# Altium PCB 2.0_X0.PcbDoc (part 2 of 2)
Units mm, origin at the board's own origin, x right, y up, seen from the top; angles counter-clockwise.
Board outline 35 x 45.39 mm, 4 copper layers (Top, Route2, Route15, Bottom), stack 1.64 mm thick; 99 components, 106 nets, 391 pads, 199 vias.
Unrouted connection lines stored in the file: 53.
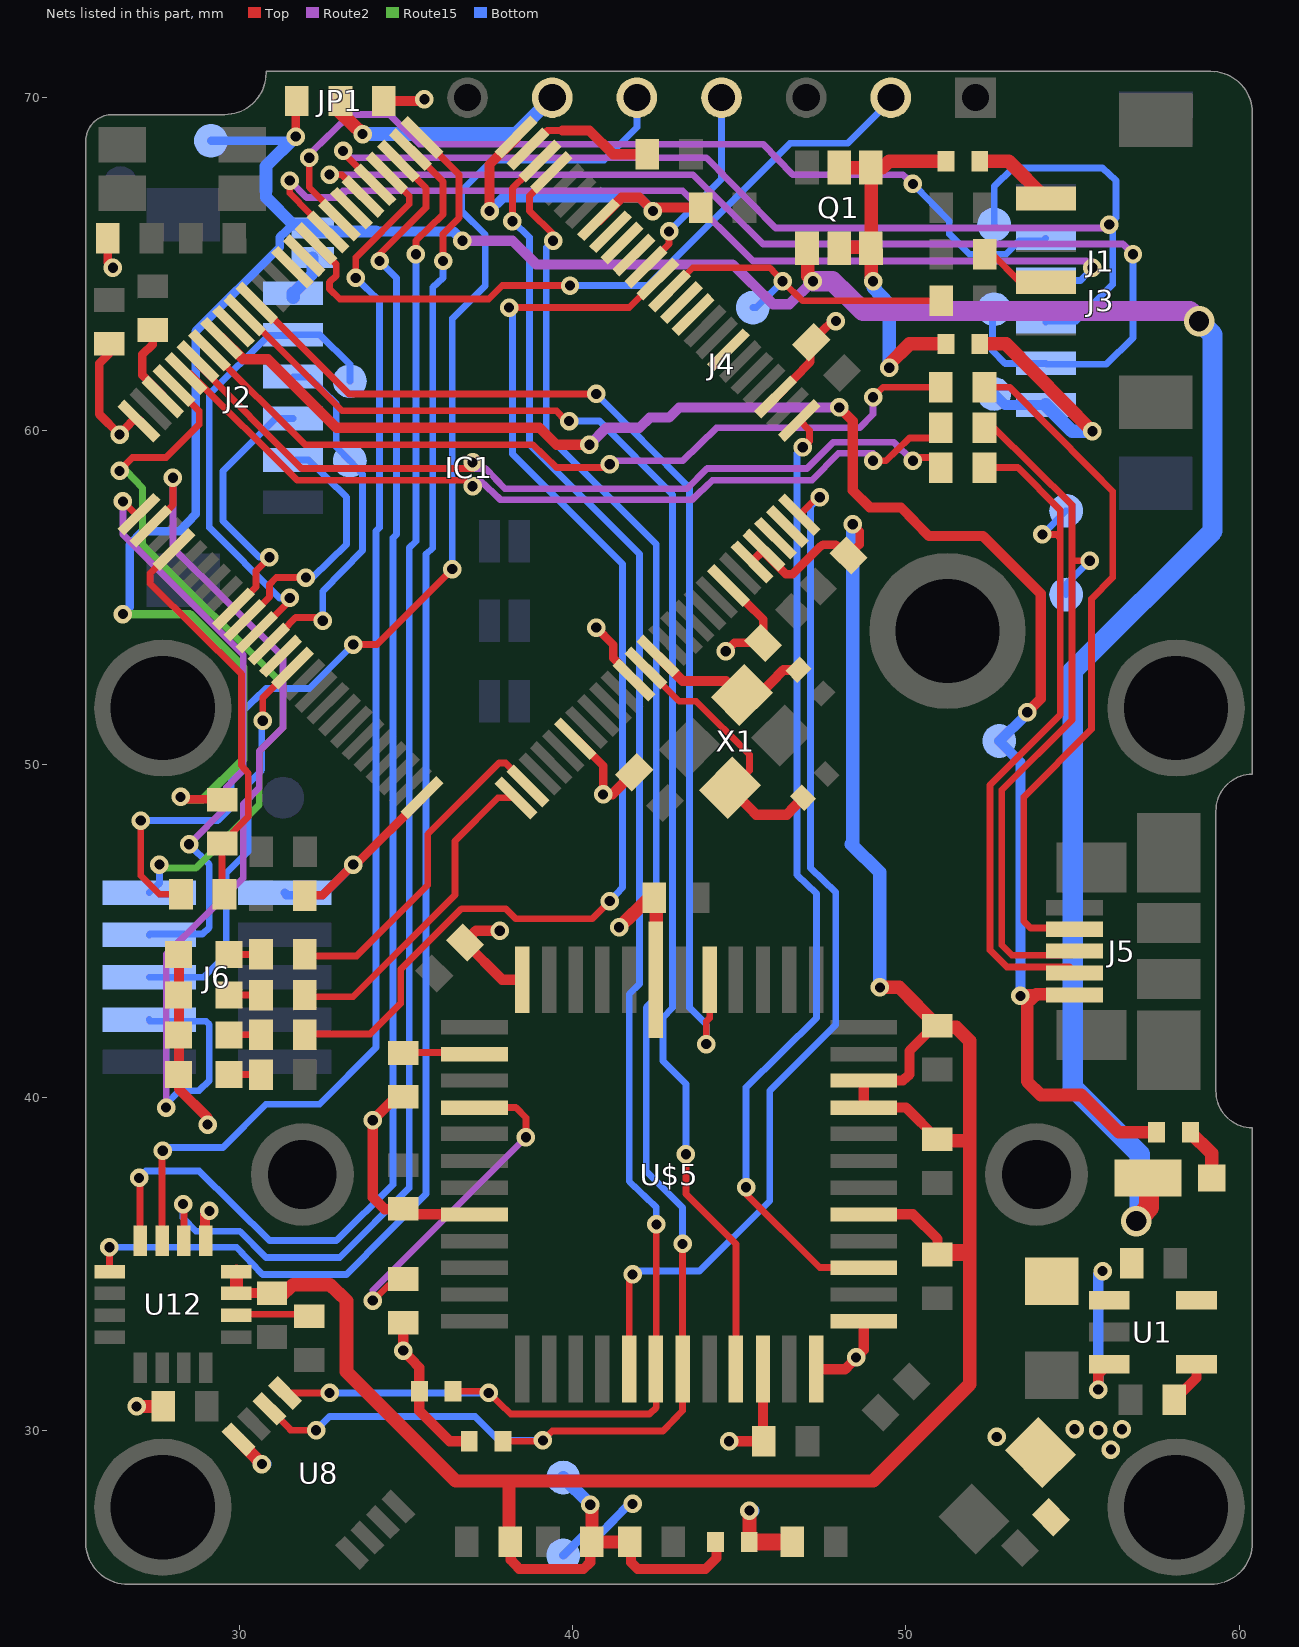
[diagram p4: the nets of this part, all layers, seen from the top]

## Via types
v1: diameter 0.555/0.555/0.555/0.555 (per signal layer), hole 0.305, Top to Bottom, 197 vias
v2: diameter 0.914/0.86/0.86/0.914 (per signal layer), hole 0.61, Top to Bottom, 2 vias

## Nets (pads, with @x,y where several pads share a name; then routed paths per layer and width w, separated by ;. In a path a pad name is that pad's centre, name@x,y a point inside that pad or via, vN(x,y) a via of type N, cw(c..) or ccw(c..) an arc to the next point about the centre after c; other vN are vias at no path point) (continued)
I2C1_SDA_EXT: J1.3 R4.2 | length 2.2
  Top w0.203: R4.2@52.375,65.303 52.603,65.303 53.416,64.491 54.178,64.491 J1.3@54.204,64.465
I2C2_SCL: IC1.47 R1.P$1 U8.6 U$5.25 | length 54.6
  Top w0.203: U8.6@30.912,30.658 31.547,30.048 31.547,30.023 v1(32.309,30.023) ; R1.P$1@37.922,29.693 39.091,29.693 v1(39.116,29.718) ; v1@39.04,29.642 v1(39.116,29.718) ; IC1.47@39.395,67.742 38.71,67.056 38.71,66.599 39.421,65.913 v1(39.421,65.71) ; v1(43.307,35.611) 43.307,31.852 43.307,30.607 42.723,29.997 39.395,29.997 v1(39.116,29.718)
  Bottom w0.203: v1(32.309,30.023) 32.715,30.429 37.084,30.429 37.795,29.718 v1(39.116,29.718) ; v1(39.421,65.71) 39.218,65.507 39.218,59.893 42.52,56.591 42.52,43.002 42.215,42.697 42.215,37.795 43.307,36.703 v1(43.307,35.611)
I2C2_SDA: IC1.48 R2.P$1 U8.5 U$5.24 | length 52.4
  Top w0.203: U8.5@31.369,31.115 31.42,31.14 v1(32.715,31.14) ; R2.P$1@36.424,31.191 37.465,31.191 v1(37.49,31.14) 38.151,30.505 42.316,30.505 42.52,30.709 42.52,31.852 v1(42.52,36.195) ; v1(38.202,66.294) 38.202,67.285 IC1.48@39.04,68.097
  Bottom w0.203: v1(32.715,31.14) v1(37.49,31.14) ; v1(38.202,66.294) 38.71,65.811 38.71,59.588 42.012,56.312 42.012,43.409 41.707,43.104 41.707,37.49 42.52,36.703 v1(42.52,36.195)
I2C3_SCL---: IC1.67
JTCK-SWCLK: IC1.76 J6.4 | length 17.8
  Top w0.203: v1(26.518,57.887) 26.924,57.48 IC1.76@27.026,57.48
  Route2 w0.203: v1@26.518,57.683 v1@26.518,57.709 ; v1(26.518,57.887) v1@26.518,57.709 ; v1(28.499,47.6) 29.616,48.717 29.616,49.301 30.124,49.809 30.124,53.289 26.518,56.896 v1@26.518,57.709
  Bottom w0.203: J6.4@27.305,44.882 27.33,44.907 28.905,44.907 29.108,45.11 29.108,46.99 v1(28.499,47.6)
JTDI: IC1.77 J6.8 | length 28.7
  Top w0.203: IC1.77@27.356,57.125 28.016,57.785 v1(28.016,58.598)
  Route2 w0.203: v1(27.813,39.7) 27.813,44.298 30.124,46.584 30.124,48.793 30.607,49.301 30.607,50.394 31.318,51.105 31.318,53.213 28.016,56.49 28.016,56.871 v1(28.016,58.598)
  Bottom w0.203: J6.8@27.305,42.342 27.33,42.291 29.007,42.291 29.108,42.189 29.108,40.513 28.804,40.208 28.219,40.208 27.813,39.802 v1(27.813,39.7)
JTDO: IC1.89 J6.6 | length 12
  Top w0.203: v1(30.709,51.308) 30.709,51.994 IC1.89@31.598,52.883
  Bottom w0.203: J6.6@27.305,43.612 28.931,43.612 29.616,44.298 29.616,46.736 30.277,47.396 30.277,49.428 30.683,49.835 30.683,51.283 v1(30.709,51.308)
JTMS-SWDIO: IC1.72 J6.2 | length 21.7
  Top w0.203: v1(26.416,58.801) 26.797,59.207 27.813,59.207 28.804,60.198 28.804,60.604 28.067,61.341 IC1.72@28.067,61.366
  Route15 w0.203: v1(26.416,58.801) 26.619,58.801 27.102,58.293 27.102,56.591 31.318,52.4 31.318,51.105 30.607,50.394 30.607,48.793 28.702,46.888 27.711,46.888 v1(27.61,46.99)
  Bottom w0.203: J6.2@27.305,46.152 27.61,46.431 v1(27.61,46.99)
LED_AMBER: IC1.1 R14.1 | length 9.8
  Top w0.203: R14.1@31.979,43.078 32.029,43.028 33.426,43.028 36.474,46.076 36.474,47.701 37.77,48.997 IC1.1@38.329,48.997
LED_BLUE: IC1.2 R15.1 | length 10.3
  Top w0.203: R15.1@31.979,44.298 32.004,44.247 33.528,44.247 35.662,46.38 35.662,47.904 37.795,50.038 37.998,50.038 38.684,49.378 IC1.2@38.684,49.352
LED_RED: IC1.38 R17.1 | length 36.1
  Top w0.203: R17.1@31.979,41.885 32.004,41.91 33.934,41.91 34.849,42.824 34.849,43.84 36.678,45.669 37.998,45.669 38.303,45.364 40.589,45.364 v1(41.123,45.898) 40.919,45.695 ; v1(38.1,63.703) 41.707,63.703 IC1.38@42.57,64.567
  Bottom w0.203: v1(38.1,63.703) 38.202,63.602 38.202,59.309 41.504,56.007 41.504,46.304 v1(41.123,45.898)
MAG_DRDY---: IC1.36
N$1: C4.P$2 IC1.13 X1.1 | length 5
  Top w0.305: IC1.13@42.57,53.238 43.307,52.502 44.602,52.502 45.034,52.07 45.085,52.07 45.11,52.095 45.618,52.095 46.33,52.832 C4.P$2@46.787,52.832
N$2: C3.P$1 IC1.12 X1.3 | length 8.2
  Top w0.203: IC1.12@42.215,52.883 43.205,51.892 43.713,51.892 45.314,50.292 45.314,49.809 44.831,49.327 X1.3@44.729,49.327
  Top w0.305: X1.3@44.729,49.327 44.729,49.276 45.314,48.692 45.517,48.489 46.431,48.489 C3.P$1@46.914,48.997
N$3: J1.1 L2.P$2 | length 2.4
  Top w0.406: L2.P$2@52.222,68.097 53.086,68.097 J1.1@54.204,66.98
N$4: C13.1 U1.4 | length 1.4
  Top w0.305: C13.1@58.064,30.937 58.725,31.598 U1.4@58.725,32.029
N$8: LED4.C R17.2 | length 1
  Top w0.203: LED4.C@29.693,41.885 R17.2@30.683,41.885
N$10: R19.1 U$5.8 | length 2.2
  Top w0.203: R19.1@34.925,41.351 37.033,41.351 U$5.8@37.084,41.3
N$11: R20.1 U$5.10 | length 10.2
  Top w0.203: v1(34.011,33.909) 34.671,34.544 R20.1@34.925,34.544 ; U$5.10@37.084,39.7 38.303,39.7 38.608,39.395 v1(38.608,38.811)
  Route2 w0.203: v1(34.011,33.909) 34.011,34.214 v1(38.608,38.811)
N$13: J2.1 JP2.2 | length 1.4
  Bottom w0.356: J2.1@31.623,64.135 32.207,64.719 JP2.2@32.207,65.202
  Bottom w0.406: J2.1@31.623,64.008 J2.1@31.623,64.135
N$23: D1.ANODE L8.P$1 | length 1.7
  Top w0.406: L8.P$1@58.522,38.964 59.182,38.329 D1.ANODE@59.182,37.592
N$28: LED3.C R15.2 | length 1
  Top w0.203: LED3.C@29.693,44.298 R15.2@30.683,44.298
N$29: LED1.C R13.2 | length 1
  Top w0.203: LED1.C@29.693,40.691 R13.2@30.683,40.691
N$30: LED2.C R14.2 | length 1
  Top w0.203: LED2.C@29.693,43.078 R14.2@30.683,43.078
N$34: C25.1 U12.14 | length 2.2
  Top w0.203: U12.14@29.921,33.503 32.055,33.503 C25.1@32.106,33.452
OTG_FS_ID: IC1.69 R7.2 | length 24.7
  Top w0.203: IC1.69@29.134,62.433 31.979,59.588 32.715,59.588 38.811,59.588 39.522,58.903 41.021,58.903 v1(41.123,59.004) ; v1(49.022,61.011) 49.327,61.316 R7.2@51.054,61.315
  Route2 w0.203: v1(41.123,59.004) 41.224,59.106 43.307,59.106 44.323,60.096 48.616,60.096 49.022,60.503 v1(49.022,61.011)
OTG_FS_N: IC1.70 R6.2 | length 25.3
  Top w0.203: IC1.70@28.778,62.078 28.778,61.976 31.877,58.877 37.008,58.877 v1(37.008,59.055) ; v1(50.216,59.106) 50.317,59.207 50.775,59.207 R6.2@51.054,58.902
  Route2 w0.203: v1(37.008,59.055) 37.008,58.877 37.389,58.877 37.973,58.268 43.434,58.268 44.044,58.877 47.041,58.877 47.828,59.665 49.632,59.665 v1(50.216,59.106)
OTG_FS_P: IC1.71 R8.2 | length 25.8
  Top w0.203: IC1.71@28.423,61.722 28.524,61.722 31.75,58.522 37.008,58.522 v1(37.008,58.344) ; v1(49.022,59.106) 49.403,59.106 50.114,59.792 50.749,59.792 R8.2@51.054,60.096
  Route2 w0.203: v1(37.008,58.344) 37.008,58.522 37.236,58.522 37.846,57.937 43.586,57.937 44.196,58.522 47.193,58.522 47.981,59.334 49.022,59.334 v1(49.022,59.106)
OTG_ID: J5.ID R7.1 | length 20.8
  Top w0.203: R7.1@52.375,61.316 53.111,61.316 55.575,58.826 56.21,58.191 56.21,55.601 55.575,54.966 55.575,51.054 53.543,49.022 53.543,45.288 53.746,45.085 54.762,45.085 55.067,45.085 J5.ID@55.093,45.06
OTG_N: J5.D- OTG_DM.P$1 R6.1 | length 21.3
  Top w0.203: R6.1@52.375,58.903 53.365,58.903 54.635,57.633 54.635,56.794 ; v1(54.102,56.896) 54.534,56.896 54.635,56.794 ; J5.D-@55.093,43.764 54.915,43.917 53.035,43.917 52.527,44.425 52.527,49.378 54.635,51.486 54.635,56.794
  Bottom w0.203: v1(54.102,56.896) OTG_DM.P$1@54.813,57.607
OTG_P: J5.D+ OTG_DP.P$1 R8.1 | length 21.9
  Top w0.203: R8.1@52.375,60.096 52.654,60.096 54.991,57.785 54.991,56.109 ; J5.D+@55.093,44.399 54.966,44.272 53.188,44.272 52.883,44.577 52.883,49.225 54.991,51.333 54.991,56.109 ; v1(55.524,56.109) 54.991,56.109
  Bottom w0.203: OTG_DP.P$1@54.813,55.093 54.813,55.397 v1(55.524,56.109)
PB2-BOOT1: BOOT1.P$1 IC1.37 R5.1 | length 10
  Top w0.203: IC1.37@42.926,64.211 43.612,64.897 45.923,64.897 v1(46.304,64.491) 46.914,63.906 R5.1@51.054,63.906
  Bottom w0.203: BOOT1.P$1@45.415,63.703 45.517,63.703 v1(46.304,64.491)
PRES_DRDY---: IC1.35
SONAR_TX: J4.TX R11.1 | length 36
  Top w0.203: v1(27.051,48.311) 27.051,46.66 27.61,46.101 R11.1@28.27,46.101 ; v1(33.426,53.594) 34.138,53.594 v1(36.398,55.855)
  Bottom w0.203: v1(27.051,48.311) 29.362,48.311 29.769,48.717 29.769,49.632 30.074,49.936 30.074,51.562 30.81,52.273 32.106,52.273 v1(33.426,53.594) ; v1(36.398,55.855) 36.398,63.373 37.389,64.364 37.389,65.888 36.678,66.599 36.678,67.208 37.592,68.123 40.945,68.123 41.935,69.113 J4.TX@41.935,70.002
SPI1_MOSI---: IC1.32
SPI2_MISO: IC1.53 U12.4 | length 43
  Top w0.203: v1(27,37.592) 27.026,37.567 U12.4@27.026,35.712 ; v1(34.214,65.1) 34.214,65.303 35.611,66.7 35.611,67.285 IC1.53@34.798,68.097
  Bottom w0.203: v1(27,37.592) 27.203,37.795 28.804,37.795 30.912,35.712 32.918,35.712 34.62,37.389 34.62,56.794 34.722,56.896 34.722,64.592 v1(34.214,65.1)
SPI2_MOSI: IC1.54 U12.3 | length 37.9
  Top w0.203: U12.3@27.686,35.712 27.686,38.379 v1(27.711,38.405) ; v1(33.503,64.592) 33.503,65.202 35.103,66.802 35.103,67.056 IC1.54@34.442,67.742
  Bottom w0.203: v1(27.711,38.405) 27.813,38.506 29.515,38.506 30.81,39.802 32.41,39.802 34.112,41.504 34.112,56.998 34.214,57.099 34.214,63.906 v1(33.503,64.592)
SPI2_NSS: IC1.51 U12.5 | length 44.2
  Top w0.203: v1(26.111,35.509) 26.111,34.798 U12.5@26.137,34.798 ; IC1.51@35.509,68.809 36.601,67.691 36.601,66.396 36.119,65.913 v1(36.119,65.1)
  Bottom w0.203: v1(26.111,35.509) 29.921,35.509 30.709,34.696 33.223,34.696 35.611,37.109 35.611,37.186 35.611,56.312 35.814,56.49 35.814,64.313 36.119,64.592 v1(36.119,65.1)
SPI2_SCK: IC1.52 U12.2 | length 41.7
  Top w0.203: v1(28.321,36.805) 28.346,36.779 28.346,35.712 U12.2@28.346,35.687 ; IC1.52@35.154,68.453 36.119,67.488 36.119,66.497 35.306,65.71 v1(35.306,65.303)
  Bottom w0.203: v1(28.321,36.805) 28.321,36.398 28.702,35.992 30.023,35.992 30.81,35.204 33.02,35.204 35.103,37.287 35.103,56.49 35.306,56.693 v1(35.306,65.303)
TIM1_CH1: IC1.40
TIM1_CH2: IC1.42
TIM4_CH2: IC1.60 J4.PW | length 21.2
  Top w0.203: IC1.60@32.309,65.608 32.918,64.999 32.918,64.668 32.715,64.465 32.715,64.262 33.02,63.957 37.49,63.957 37.897,64.364 v1(39.929,64.364)
  Bottom w0.203: v1(39.929,64.364) 42.266,64.364 46.533,68.631 48.26,68.631 49.555,69.926 J4.PW@49.555,70.002
TIM4_CH3: IC1.61
TIM4_CH4: IC1.62
TIM5_CH1: IC1.23
TIM5_CH2: IC1.24
TIM5_CH3_EXPOSURE: IC1.25 U$5.23 | length 31.2
  Top w0.203: U$5.23@41.707,31.852 41.707,34.595 v1(41.808,34.696) ; IC1.25@46.812,57.48 47.422,58.09 v1(47.422,58.014)
  Bottom w0.203: v1(41.808,34.696) 41.91,34.798 43.815,34.798 45.923,36.906 45.923,40.208 47.904,42.189 47.904,46.152 47.142,46.888 47.142,57.734 v1(47.422,58.014)
TIM5_CH4_STANDBY: IC1.26 U$5.33 | length 29.1
  Top w0.203: v1(45.212,37.313) 45.212,37.109 47.422,34.9 U$5.33@48.743,34.9 ; IC1.26@46.812,60.325 47.117,60.02 47.117,59.69 v1(46.914,59.512)
  Bottom w0.203: v1(45.212,37.313) 45.212,40.31 47.32,42.393 47.32,46.126 46.736,46.685 46.736,59.334 v1(46.914,59.512)
TIM8_CH3_MASTERCLOCK: IC1.65 U$5.47 | length 34.1
  Top w0.203: IC1.65@30.556,63.856 33.299,61.112 v1(40.716,61.112) ; v1(44.018,41.605) 44.018,42.291 44.12,42.393 U$5.47@44.12,43.536
  Bottom w0.203: v1(40.716,61.112) 43.51,58.293 43.51,42.697 44.018,42.189 v1(44.018,41.605)
TIM8_CH4_LED_OUT: IC1.66 U$5.27 | length 42.3
  Top w0.203: IC1.66@30.201,63.5 33.096,60.604 39.522,60.604 39.802,60.3 v1(39.903,60.3) ; v1(43.409,38.303) 43.409,37.109 44.907,35.611 U$5.27@44.907,31.852
  Bottom w0.203: v1(39.903,60.3) 40.818,60.3 43.002,58.09 43.002,42.697 42.723,42.393 42.723,41.097 43.409,40.411 v1(43.409,38.303)
UART4_RX: IC1.79 R10.2 R11.2 | length 12.2
  Top w0.203: IC1.79@28.067,56.439 28.042,56.439 27.33,55.728 27.33,55.423 30.074,52.705 30.074,49.962 30.277,49.733 30.277,48.438 R10.2@29.489,47.625 29.489,46.177 R11.2@29.566,46.101
US_EN1: IC1.39 J4.RX | length 6
  Top w0.203: IC1.39@42.215,64.922 42.901,65.608 v1(42.901,65.989)
  Bottom w0.203: v1(42.901,65.989) 44.475,67.564 J4.RX@44.475,70.002
US_EN2: IC1.41
USART2_CK: IC1.88
USART2_CTS: IC1.84 J2.4 | length 8.1
  Top w0.203: IC1.84@29.845,54.661 30.505,55.321 30.505,55.804 v1(30.912,56.21)
  Bottom w0.203: v1(30.912,56.21) 30.607,56.21 29.515,57.302 29.515,58.801 31.09,60.376 J2.4@31.623,60.376
USART2_RTS: IC1.85 J2.5 | length 7.7
  Top w0.203: IC1.85@30.201,54.305 30.912,55.016 30.912,55.397 31.115,55.601 v1(32.004,55.601)
  Bottom w0.203: J2.5@31.623,59.131 32.08,59.131 33.223,58.014 33.223,56.591 32.207,55.601 v1(32.004,55.601)
USART2_RX: IC1.87 J2.3 USART2_RX.P$1 | length 10.9
  Top w0.203: IC1.87@30.912,53.594 31.699,54.407 32.41,54.407 v1(32.512,54.305)
  Bottom w0.203: J2.3@31.623,61.62 32.08,61.62 32.918,60.808 32.918,59.512 USART2_RX.P$1@33.325,59.106 33.706,58.699 33.706,56.413 32.512,55.194 v1(32.512,54.305)
USART2_TX: IC1.86 J2.2 USART2_TX.P$1 | length 14.7
  Top w0.203: IC1.86@30.556,53.95 31.598,54.991 v1(31.521,54.991)
  Bottom w0.203: v1(31.521,54.991) 31.42,54.991 31.217,54.991 29.108,57.099 29.108,61.112 30.886,62.865 31.623,62.865 31.648,62.89 32.41,62.89 33.325,62.001 USART2_TX.P$1@33.325,61.493
USART3_CK: IC1.57
USART3_CTS: IC1.58 J3.5 | length 27.1
  Top w0.203: v1(32.106,68.199) 32.106,67.31 33.02,66.396 IC1.58@33.02,66.319
  Route2 w0.203: v1(32.106,68.199) 32.106,68.301 33.325,69.494 34.519,69.494 35.408,68.605 45.72,68.605 46.609,67.691 49.911,67.691 v1(50.216,67.412)
  Bottom w0.203: v1(50.216,67.412) 51.308,66.294 51.308,65.913 51.918,65.303 53.01,65.303 53.416,65.71 54.127,65.71 J3.5@54.204,65.786
USART3_RTS: IC1.59 J3.4 | length 29
  Top w0.203: v1(31.521,67.513) 31.521,67.132 IC1.59@32.664,65.964
  Route2 w0.203: v1(31.521,67.513) 32.029,67.005 33.02,67.005 33.223,67.208 ; 33.122,67.208 33.223,67.208 ; v1(55.601,64.897) 55.423,65.1 45.415,65.1 43.307,67.208 33.223,67.208
  Bottom w0.203: J3.4@54.204,64.516 55.245,64.516 v1(55.601,64.897)
USART3_RX: IC1.56 J3.2 USART3_RX.P$1 | length 34.9
  Top w0.203: v1(32.715,67.691) 33.071,67.691 IC1.56@33.731,67.031
  Route2 w0.203: v1(32.715,67.691) 43.612,67.691 45.72,65.608 55.423,65.608 56.515,65.608 v1(56.82,65.303)
  Bottom w0.203: USART3_RX.P$1@52.654,63.652 52.603,63.627 52.603,62.408 52.984,62.027 54.204,62.027 54.229,62.001 56.007,62.001 56.82,62.789 v1(56.82,65.303)
USART3_TX: IC1.55 J3.3 USART3_TX.P$1 | length 36.3
  Top w0.203: v1(33.122,68.402) 33.122,68.351 IC1.55@34.087,67.386
  Route2 w0.203: v1(33.122,68.402) 33.325,68.199 44.018,68.199 46.101,66.091 55.804,66.091 56.007,66.091 v1(56.109,66.192)
  Bottom w0.203: USART3_TX.P$1@52.654,66.192 52.654,67.335 53.213,67.894 55.905,67.894 56.312,67.513 56.312,66.396 v1(56.109,66.192) 56.21,66.091 56.21,64.389 55.118,63.297 54.229,63.297 J3.3@54.204,63.271
VBUS: IC1.68 J5.VBUS L8.P$2 USB_VBUS.P$1 | length 51.7
  Top w0.305: IC1.68@29.489,62.789 30.124,62.154 30.861,62.154 32.918,60.096 39.014,60.096 39.522,59.588 v1(40.513,59.588) ; v1(48.006,60.706) 48.412,60.3 48.412,58.217 48.92,57.709 49.86,57.709 50.698,56.845 52.324,56.845 54.051,55.118 54.051,51.968 v1(53.645,51.562) ; v1(53.442,43.053) 53.518,43.104 53.924,43.104
  Top w0.381: J5.VBUS@55.093,43.104 53.924,43.104 53.645,42.85 53.645,40.488 54.051,40.081 55.27,40.081 56.388,38.964 L8.P$2@57.531,38.964
  Route2 w0.305: v1(40.513,59.588) 41.021,60.096 42.012,60.096 42.316,60.401 42.901,60.401 43.205,60.706 v1(48.006,60.706)
  Bottom w0.305: v1(53.442,43.053) 53.442,50.063 USB_VBUS.P$1@52.807,50.698 53.619,51.486 53.645,51.486 v1(53.645,51.562)
VCAP_1: C11.1 IC1.49 | length 4.1
  Top w0.203: IC1.49@38.684,68.453 39.243,69.012 39.7,69.012
  Top w0.305: 39.7,69.012 40.513,69.012 41.224,68.301 C11.1@42.266,68.301
VCAP_2: C12.1 IC1.73 | length 2.4
  Top w0.254: C12.1@27.407,63.043 27.407,62.586 27.102,62.306 27.102,61.671 27.711,61.062 IC1.73@27.711,61.011
VDD_3V3: C2.1 C5.1 C6.A C8.1 C9.1 C10.1 C16.1 C18.1 C28.1 C29.1 C30.1 C31.1 C32.1 IC1.6 IC1.11 IC1.19 IC1.28 IC1.43 IC1.50 IC1.75 IC1.100 J6.1 JP1.3 L11.P$1 LED1.A LED2.A LED3.A LED4.A R1.P$2 R2.P$2 R9.2 R16.2 R19.2 R20.2 U1.5 U8.8 U12.1 U$5.1 U$5.6 U$5.14 U$5.28 U$5.30 U$5.31 VDD_3V3.P$1 | length 75.1
  Top w0.254: R16.2@26.06,65.786 26.06,65.049 v1(26.213,64.897) ; C28.1@26.111,62.611 26.111,62.332 25.806,62.027 25.806,60.503 v1(26.416,59.893) 26.822,60.325 IC1.75@27.026,60.325 ; C29.1@31.953,46.05 31.979,46.076 32.512,46.076 v1(33.426,46.99) 33.503,46.99 IC1.100@35.509,48.997 ; IC1.6@40.107,50.775 40.919,49.962 v1(40.919,49.098) ; v1(40.716,54.102) 41.224,53.594 41.224,53.188 IC1.11@41.859,52.527 ; v1(41.808,27.813) v1@41.91,27.813 ; v1(44.602,53.391) 44.856,53.645 45.72,53.645 45.72,54.356 IC1.19@44.679,55.372 ; IC1.28@46.101,61.011 47.142,62.078 47.142,62.662 47.803,63.297 v1(47.904,63.297)
  Top w0.305: C28.1@26.111,62.611 C28.1@26.111,62.636 ; LED3.A@28.194,44.298 28.194,43.078 28.194,41.885 28.194,40.691 28.194,40.259 29.058,39.395 v1(29.058,39.192) ; U12.1@28.981,35.712 28.981,36.474 v1(29.108,36.601) ; v1@34.011,39.421 v1(34.011,39.319) ; JP1.3@34.341,69.901 35.636,69.901 v1(35.56,69.952) ; R20.2@34.9,33.249 R20.2@34.925,33.249 v1(34.925,32.41) 35.408,31.902 R2.P$2@35.408,31.191 35.408,30.607 36.322,29.693 R1.P$2@36.906,29.693 ; R19.2@34.925,40.056 34.747,40.056 v1(34.011,39.319) ; U$5.14@37.084,36.5 35.052,36.5 34.925,36.652 34.366,36.652 34.011,37.008 v1(34.011,39.319) ; v1(37.516,66.599) 37.516,67.996 IC1.50@38.329,68.809 ; v1(37.821,45.009) 37.109,45.009 36.779,44.653 37.897,43.536 U$5.6@38.506,43.536 ; IC1.43@40.792,66.319 41.478,67.005 42.012,67.005 v1(42.418,66.599) 42.52,66.7 C8.1@43.866,66.7 ; v1(40.919,49.098) 41.199,49.098 C9.1@41.859,49.759 ; v1(44.704,29.693) 45.771,29.693 45.72,29.743 U$5.28@45.72,31.852 ; U$5.30@47.32,31.852 48.184,31.852 v1(48.514,32.207) 48.743,32.436 U$5.31@48.743,33.299
  Top w0.381: v1(26.924,30.734) 26.949,30.734 C30.1@27.711,30.734 ; U8.8@29.997,29.743 29.997,29.718 v1(30.683,29.007)
  Top w0.406: v1(41.402,45.11) 42.316,45.999 42.469,45.999 42.52,45.949 U$5.1@42.52,43.536 ; L11.P$1@45.314,26.67 45.314,27.584 v1(45.314,27.61)
  Top w0.508: L11.P$1@45.314,26.67 C32.1@46.609,26.67
  Route2 w0.305: v1(37.821,45.009) v1@37.922,45.009
  Bottom w0.254: J6.1@31.369,46.152 31.42,46.076 32.512,46.076 v1(33.426,46.99) v1@33.426,46.888 ; VDD_3V3.P$1@39.726,26.264 40.361,26.899 40.818,26.899 41.707,27.813 v1(41.808,27.813)
  Bottom w0.305: v1(29.108,36.601) v1@29.21,36.601 ; v1(37.516,66.599) 37.922,67.005 42.012,67.005 v1(42.418,66.599)
  Bottom w0.381: v1(30.683,29.007) v1@30.785,29.007
  Bottom w0.406: v1(45.314,27.61) v1@45.415,27.61
  other v1: 56.159,29.439 52.73,29.82 55.778,30.023 55.067,30.048 56.49,30.048
VDD_3V3_ANALOG: C15.1 C19.1 C20.1 C21.1 C22.1 C23.1 C24.1 C26.1 IC1.21 IC1.22 L11.P$2 U12.15 U12.16 U$5.35 U$5.39 U$5.40 VDD_3V3_ANALOG.P$1 | length 86.4
  Top w0.254: IC1.21@45.39,56.083 45.745,56.439 45.745,56.363 46.406,55.702 46.609,55.702 47.422,56.515 47.523,56.591 47.904,56.591 48.26,56.261 48.285,56.261 48.616,56.591 48.616,56.998 v1(48.412,57.201)
  Top w0.305: U12.15@29.921,34.138 C21.1@30.988,34.138 ; C23.1@38.151,26.67 38.151,26.137 38.405,25.857 40.335,25.857 40.538,26.06 C26.1@40.538,26.645 ; C24.1@41.758,26.645 41.758,26.06 41.961,25.857 43.993,25.857 44.323,26.187 L11.P$2@44.323,26.67 ; U$5.35@48.743,36.5 50.216,36.5 50.952,35.763 C19.1@50.952,35.306 ; C22.1@50.952,38.76 50.013,39.7 U$5.39@48.743,39.7 U$5.40@48.743,40.513 49.911,40.513 50.114,40.691 50.114,41.402 50.851,42.139 50.952,42.139 C20.1@50.952,42.113
  Top w0.381: U12.15@29.921,34.138 U12.16@29.921,34.798 ; 36.5,28.499 38.125,28.499 ; C23.1@38.151,26.67 38.1,26.721 38.1,28.499 38.125,28.499 ; C26.1@40.538,26.645 C26.1@40.589,26.67 ; v1(40.538,27.788) 40.589,27.762 C26.1@40.589,26.67 ; C24.1@41.758,26.645 41.732,26.67 C26.1@40.589,26.67 ; 49.022,28.499 38.125,28.499
  Top w0.406: C21.1@30.988,34.138 31.344,34.138 31.623,34.392 32.715,34.392 33.223,33.909 33.223,31.775 36.5,28.499 ; 49.022,28.499 51.918,31.394 51.918,35.408 ; v1(49.225,43.307) 49.809,43.307 C20.1@50.952,42.139 ; C22.1@50.902,38.71 51.918,38.71 ; C20.1@50.952,42.113 51.511,42.113 51.918,41.707 51.918,38.71 ; 51.918,35.408 50.952,35.408 50.952,35.306 51.816,35.306 51.918,35.408 ; 51.918,35.408 51.918,38.71
  Bottom w0.381: VDD_3V3_ANALOG.P$1@39.726,28.6 v1(40.538,27.788)
  Bottom w0.406: v1(48.412,57.201) 48.412,47.65 48.362,47.6 49.225,46.761 v1(49.225,43.307)
VDD_5V: C7.1 C27.A D1.CATHODE JP1.1 JP2.1 Q1.4 R10.1 U1.1 U1.3 VDD_5V.P$1 | length 97.9
  Top w0.254: v1(28.245,49.022) 28.346,48.946 R10.1@29.489,48.946 ; v1(31.699,68.834) 31.699,69.875 JP1.1@31.725,69.901
  Top w0.305: v1(55.778,31.242) 55.778,31.699 U1.3@56.109,32.029
  Top w0.406: Q1.4@47.066,65.507 47.066,64.643 v1(47.219,64.491)
  Top w0.61: v2(56.921,36.297) 57.302,36.703 57.302,37.567 D1.CATHODE@57.277,37.592
  Route2 w0.305: v1(36.703,65.71) 38.202,65.71 38.913,64.999 44.806,64.999 46.025,63.805 46.507,63.805 v1(47.219,64.491)
  Route2 w0.61: v1(47.219,64.491) 47.803,64.491 48.717,63.602 58.522,63.602 v2(58.801,63.297)
  Route15 w0.254: v1(26.518,54.508) 28.524,54.508 30.124,52.908 30.124,50.14 28.905,48.946 28.346,48.946 v1(28.245,49.022)
  Bottom w0.254: v1(26.518,54.508) 26.721,54.712 26.721,56.591 27.102,56.998 28.219,56.998 28.702,57.506 28.702,62.992 31.217,65.507 31.217,65.811 JP2.1@31.623,66.192 ; VDD_5V.P$1@29.159,68.707 v1@31.547,68.707
  Bottom w0.305: v1@31.547,68.707 31.572,68.707 v1(31.699,68.834) ; 34.112,65.989 36.424,65.989 v1(36.703,65.71) ; v1(55.778,31.242) 55.778,34.696 v1(55.905,34.798)
  Bottom w0.356: 30.81,67.208 30.81,67.005 31.623,66.192 32.106,66.192 JP2.1@32.207,66.091 32.309,65.989 34.112,65.989
  Bottom w0.381: 30.81,67.208 30.81,67.945 v1(31.699,68.834)
  Bottom w0.61: v2(56.921,36.297) 57.023,36.398 57.023,38.303 55.016,40.31 55.016,52.807 59.207,56.998 59.207,62.89 v2(58.801,63.297)
VDD_5V_IN: L1.P$1 L2.P$1 Q1.1 Q1.2 Q1.5 Q1.6 | length 12.5
  Top w0.406: Q1.5@48.006,65.507 Q1.6@48.971,65.507 ; Q1.2@48.006,67.894 Q1.1@48.971,67.894 ; v1(49.022,64.491) 48.971,64.541 Q1.6@48.971,65.507 ; v1(49.505,61.9) 49.505,62.001 50.114,62.611 L1.P$1@51.206,62.611 ; L2.P$1@51.206,68.097 49.505,68.097 49.301,67.894 Q1.1@48.971,67.894 ; Q1.6@48.971,65.507 Q1.1@48.971,67.894
  Bottom w0.406: v1(49.022,64.491) 49.022,64.313 49.505,63.805 v1(49.505,61.9)
VDD_5V_IN_UART3: J3.1 L1.P$2 VDD_5V_IN.P$1 | length 7.9
  Top w0.406: L1.P$2@52.222,62.611 53.01,62.611 v1(55.601,59.995)
  Bottom w0.305: VDD_5V_IN.P$1@52.654,61.112 52.984,60.782 J3.1@54.205,60.782
  Bottom w0.406: J3.1@54.205,60.782 54.991,59.995 v1(55.601,59.995)
VDD_SONAR: J4.VDD JP1.2 | length 7.4
  Top w0.406: JP1.2@33.02,69.901 33.02,69.571 v1(33.706,68.91)
  Bottom w0.406: v1(33.706,68.91) 38.303,68.91 J4.VDD@39.395,70.002
pads on no net: J1.S1 J1.S2 J2.S1 J2.S2 J3.S1 J3.S2 J4.BW J4.P$1 J5.GND5 J5.GND6 J6.7 S1.A2 S1.B4 U8.7 U12.6 U12.7 U$1.P$1 U$2.P$1 U$3.P$1 U$4.P$1 U$5.2 U$5.3 U$5.4 U$5.5 U$5.22 U$5.26 U$5.36 U$5.37 U$8.P$1 U$8.P$2

## Polygon pours and split planes (outlines as drawn)
VDD_5V on Top "Top-VDD_5V" (solid, remove dead copper, shelved, pour order 10): 52.273,33.579 52.273,33.414 52.667,33.02 57.264,33.02 57.556,33.312 57.556,36.157 58.369,36.97 58.369,38.303 56.122,38.303 52.273,34.455
VDD_3V3 on Top "Top-VDD_3V3" (solid, remove dead copper, shelved, pour order 8): 58.154,37.389 60.503,37.389 60.503,31.077 58.991,29.566 57.366,29.566 54.864,27.064 52.724,29.204 52.273,29.655 52.273,30.391 52.667,30.785 56.744,30.785 56.744,35.979
GND on Top "Top-GND 1" (solid, remove dead copper, shelved, pour order 4): 53.911,27.432 53.098,27.432 51.473,29.058 50.737,29.058 50.038,28.359 50.038,27.521 51.346,26.213 54.038,26.213 54.395,26.57 54.557,26.786
GND on Top "Top-GND" (solid, remove dead copper, shelved, pour order 2): 52.566,33.325 57.264,33.325 57.556,33.032 57.556,30.874 57.162,30.48 52.566,30.48 52.273,30.772 52.273,33.032

## Keep-outs
Keep-Out Layer:
  the board outline again, w0

## Silkscreen, mask and mechanical layers (free items; w line width, h text height)
Top Overlay:
  text "." at 51.918,71.069 h1.71 r270
  text "." at 53.264,69.952 h1.71 r270
  text "J4" at 58.826,69.469 h0.69
  text "RST" at 30.861,68.885 h0.6 r270
  text "1" at 55.773,67.743 h0.69 r270.02
  text "J1" at 59.456,62.439 h0.69 r270.02
  text "." at 53.442,61.011 h1.71 r270
  text "I2C1" at 57.935,59.05 h0.69 r0.01
  text "M12x0.5 LENS" at 54.476,58.983 h0.69 r270.02
  text "USB" at 54.445,48.941 h0.69 r0.01
  text "ACT" at 25.603,43.84 h0.69
  text "COM" at 25.603,42.621 h0.69
  text "ERR" at 25.603,41.504 h0.69
  text "ON" at 25.603,40.284 h0.69
  text "J5" at 56.101,39.263 h0.69 r0.01
  text "Gute nuggets" at 38.71,33.401 h1.26
Bottom Overlay:
  circle w0.305: c52.527,44.501 r0.66
  lines w0.305: 52.019,44.094 52.934,45.009 ; 52.121,44.907 52.934,44.094 ; 52.527,45.212 52.527,46.939 ; 53.238,44.501 55.372,44.501 ; 55.372,44.501 54.864,45.009 54.864,43.993 55.372,44.501 ; 52.019,46.736 52.527,47.244 53.035,46.736 52.019,46.736
  text "ULTRASOUND" at 48.666,68.631 h0.69
  text "J2" at 26.518,65.278 h0.69 r90
  text "." at 32.817,63.652 h1.71 r90
  text "." at 56.896,63.144 h1.71 r90
  text "J3" at 60.147,61.722 h0.69 r90
  text "I2C BUS ADDR" at 40.615,59.512 h0.86 r90
  text "USART3" at 59.868,56.49 h0.69
  text "2" at 36.17,56.337 h0.69
  text "USART2" at 34.343,55.316 h0.69 r359.99
  text "1" at 36.17,53.899 h0.69
  text "0" at 36.17,51.46 h0.69
  text "Y" at 51.883,46.543 h2.36 r359.99
  text "JTAG" at 34.296,44.747 h0.69 r89.98
  text "X" at 57.16,43.8 h2.36 r359.99
  text "Z" at 53.825,41.971 h2.36 r359.99
  text "J6" at 26.396,38.082 h0.69 r89.98
  text "(c) lm/dh" at 59.722,36.476 h0.69 r89.98
  text "PX4FLOW v1.3" at 49.987,29.108 h1.3
Dimension:
  the board outline again, w0.01
tDocu:
  text "5.0V" at 54.015,69.58 h0.52 r270.02
bDocu:
  text "5.0V" at 32.131,69.621 h0.52 r90
  text "3.3V" at 35.712,69.621 h0.52 r90
  text "3.3V from UART" at 33.02,63.424 h0.52 r90
  text "I2C Address" at 35.749,56.798 h0.52 r89.98
  text "2" at 36.561,56.708 h0.52 r89.98
  text "1" at 36.561,54.148 h0.52 r89.98
  text "0" at 36.561,51.907 h0.52 r89.98

## Dimensions
25.4,25.502 to 60.401,25.502 on tDocu
60.401,25.502 to 60.401,70.79 on tDocu

## Text inside footprints (layer, text, board x,y; h text height)
J1: tDocu "1" at 53.406,67.1 h0.43 r270
J2: bDocu "1" at 32.421,64.311 h0.43 r90
J3: bDocu "1" at 53.405,60.608 h0.43 r269.98
J4: Top Overlay "BW" at 52.553,67.518 h0.69 r90.02; Top Overlay "GND" at 37.29,66.818 h0.69 r90.02; Top Overlay "VDD" at 39.83,66.818 h0.69 r90.02; Top Overlay "PW" at 49.99,67.518 h0.69 r90.02; Top Overlay "AN" at 47.45,67.518 h0.69 r90.02; Top Overlay "RX" at 44.91,67.518 h0.69 r90.02; Top Overlay "TX" at 42.37,67.518 h0.69 r90.02
U12: tDocu "Z" at 27.316,34.507 h0.43 r270; tDocu "Y" at 29.337,34.407 h0.43 r270; tDocu "X" at 27.316,32.487 h0.43 r270
U$5: Top Overlay "1" at 45.314,39.294 h0.86